# Altium PCB 210120_pcbVer2.PcbDoc
Units mm, origin at the board's own origin, x right, y up, seen from the top; angles counter-clockwise.
Board outline 122.05 x 85.98 mm, 2 copper layers (Top Layer, Bottom Layer); 54 components, 41 nets, 168 pads, 30 vias.
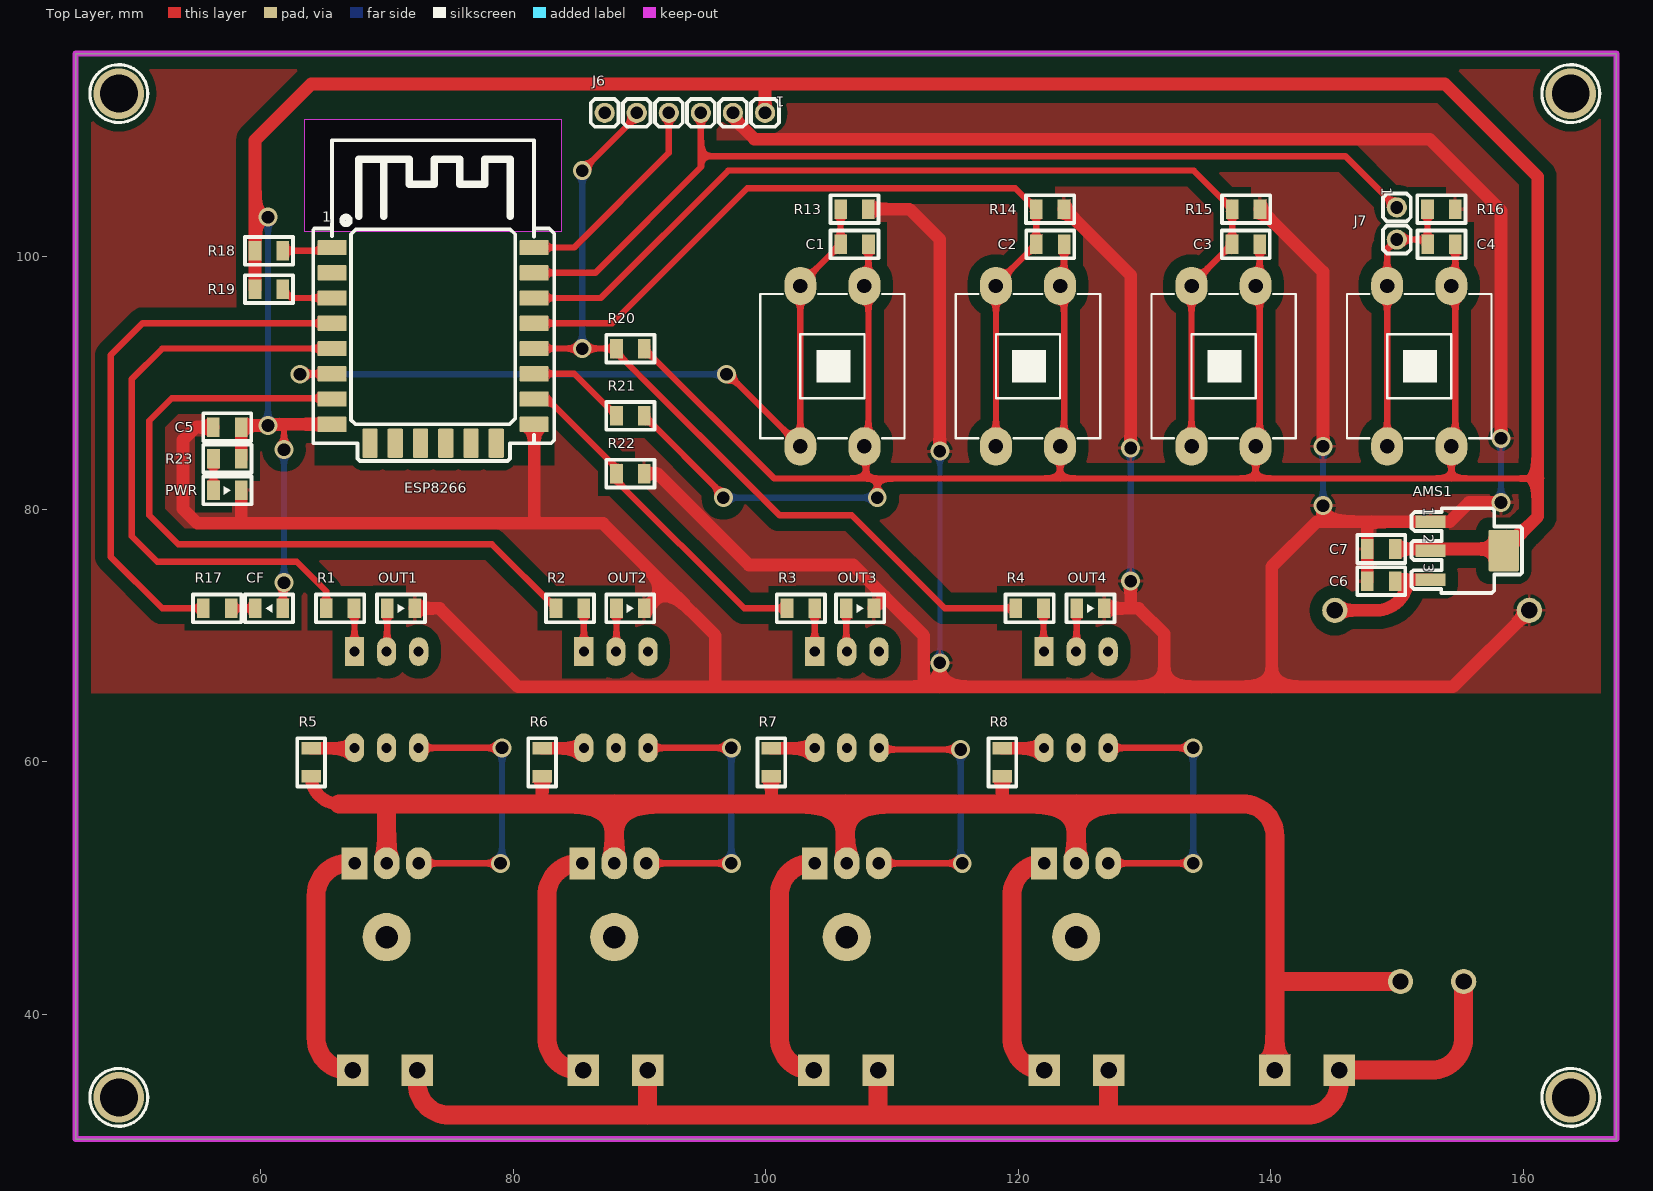
[diagram p0: Top Layer view]
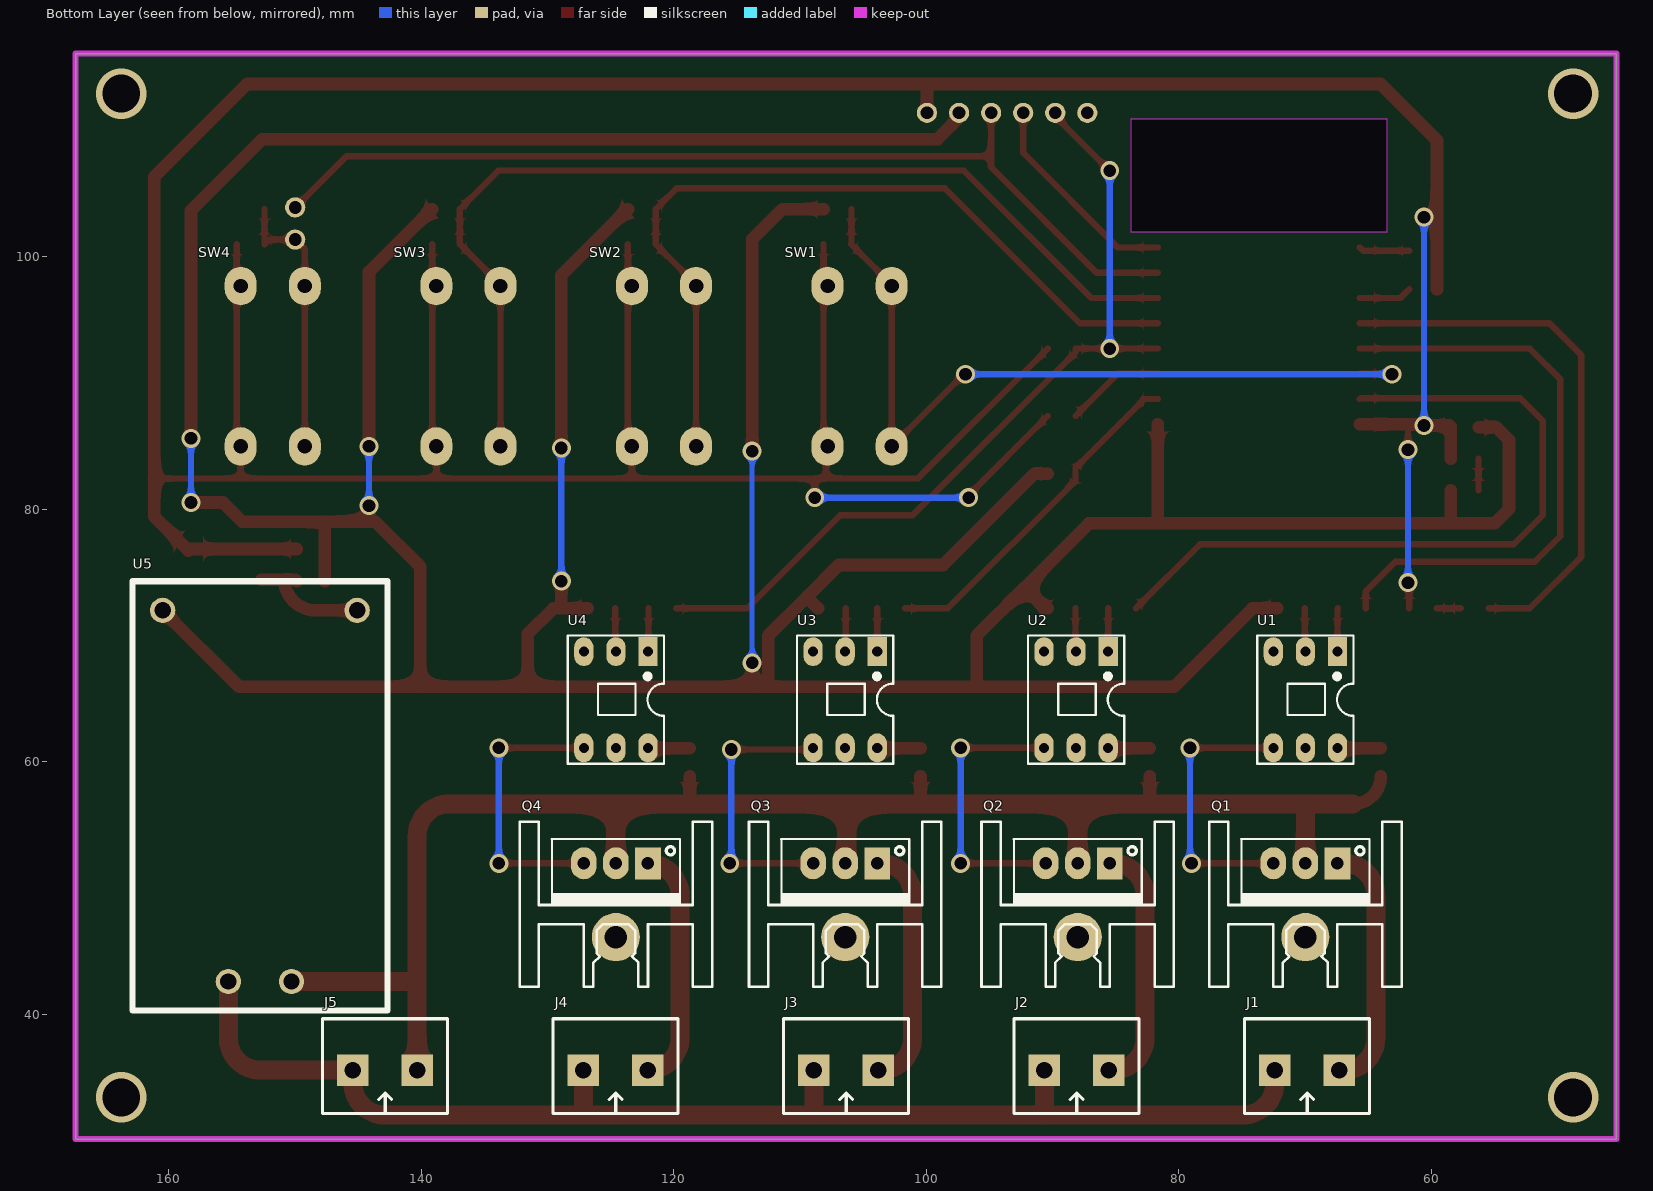
[diagram p1: Bottom Layer view, seen from below]

## Layer stack, top to bottom
Top Solder: solder mask 0.0102, Solder Resist, Dk 3.5
Top Layer: signal copper 0.0356
Dielectric 1: dielectric 0.32, FR-4, Dk 4.8
Bottom Layer: signal copper 0.0356
Bottom Solder: solder mask 0.0102, Solder Resist, Dk 3.5

## Board outline
45.339,30.099 45.339,116.078 167.386,116.078 167.386,30.099
cut-out: 63.5,101.981 63.5,110.871 83.82,110.871 83.82,101.981

## Design rules (kind name [scope] priority, off if disabled: settings)
Clearance [All] p1: gap=0.5 ignorepadtopadclearanceinfootprint=FALSE
ComponentClearance [All] p1: gap=0 collisioncheckmode=3 verticalgap=0 showdistances=FALSE
HoleSize [All] p1: absolutevalues=TRUE maxlimit=6 minlimit=0.025 maxpercent=80.000 minpercent=20.000
HoleToHoleClearance [All] p1: gap=0 allowstackedmicrovias=TRUE
MinimumSolderMaskSliver [All] p1: minsoldermaskwidth=0
PolygonConnect [All] p1: connectstyle=Relief reliefconductorwidth=0.254 reliefentries=4 polygonreliefangle="90 Angle" airgapwidth=0.254
RoutingVias [All] p1: holewidth=1 width=1.5 viastyle="Through Hole" minholewidth=1 minwidth=1.5 maxholewidth=1.5 maxwidth=2
SilkToSilkClearance [All] p1: silktosilkclearance=0
SilkToSolderMaskClearance [IsPad] p1: minsilkscreentomaskgap=0 clearancetoexposedcopper=TRUE
SolderMaskExpansion [All] p1: expansion=0
Width [All] p1: maxlimit=2 minlimit=0.4 preferedwidth=0.5
24 further rules are at their usual default settings.

## Classes and differential pairs
component class DATN_Schematic: "AC/DC 5V-3W" CF ESP8266 MOC3020 PWR R20 R21 R22 R23 SW1 SW2 SW3 SW4 U2 U3 U4

## Components (designator, comment, footprint, x,y, rotation, side; value= is the part's Value field where it differs from the comment)
AMS1 "AMS1117-3V3" AMS1117 144.804,78.308 r270 top
C1 "0.1uF/50V" "Cap 0805(2012)" 108.143,100.965 r180 top
C2 "0.1uF/50V" "Cap 0805(2012)" 123.637,100.965 r180 top
C3 "0.1uF/50V" "Cap 0805(2012)" 139.131,100.965 r180 top
C4 "0.1uF/50V" "Cap 0805(2012)" 154.625,100.965 r180 top
C5 "0.1uF/50V" "Cap 0805(2012)" 56.261,86.487 r0 top
C6 "22uF" "Cap 0805(2012)" 147.66,74.295 r0 top
C7 "22uF" "Cap 0805(2012)" 147.66,76.835 r0 top
CF "LED_BLUE" LED0805BLUE 60.663,72.136 r180 top value=Blue
ESP8266 "ESP8266-V12" "ESP-8266 V12" 65.661,100.711 r0 top
J1 "KF2" KF2-5.08 69.85,35.56 r0 bottom
J2 "KF2" KF2-5.08 88.106,35.56 r0 bottom
J3 "KF2" KF2-5.08 106.362,35.56 r0 bottom
J4 "KF2" KF2-5.08 124.619,35.56 r0 bottom
J5 "KF2" KF2-5.08 142.875,35.56 r0 bottom
J6 "Header 6" "HEADER x6" 93.599,111.379 r180 top
J7 "Header 2" "HEADER x2" 149.987,103.886 r270 top
OUT1 "LED_RED" LED0805RED 71.12,72.136 r0 top value=Red
OUT2 "LED_RED" LED0805RED 89.281,72.136 r0 top value=Red
OUT3 "LED_RED" LED0805RED 107.485,72.136 r0 top value=Red
OUT4 "LED_RED" LED0805RED 125.73,72.136 r0 top value=Red
PWR "LED_RED" LED0805RED 57.371,81.486 r0 top value=Red
Q1 "BTA24-600" TO220H1 69.977,51.943 r0 bottom
Q2 "BTA12-600" TO220H1 88.011,51.943 r0 bottom
Q3 "BTA12-600" TO220H1 106.426,51.943 r0 bottom
Q4 "BTA12-600" TO220H1 124.587,51.943 r0 bottom
R1 "39R" "Res 0805(2012)" 66.294,72.136 r180 top
R2 "39R" "Res 0805(2012)" 84.498,72.136 r180 top
R3 "39R" "Res 0805(2012)" 102.786,72.136 r180 top
R4 "39R" "Res 0805(2012)" 120.904,72.136 r180 top
R5 "1K" "Res 0805(2012)" 64.008,59.944 r90 top
R6 "1K" "Res 0805(2012)" 82.296,59.944 r90 top
R7 "1K" "Res 0805(2012)" 100.457,59.944 r90 top
R8 "1K" "Res 0805(2012)" 118.745,59.944 r90 top
R13 "10k" "Res 0805(2012)" 107.033,103.759 r180 top
R14 "10k" "Res 0805(2012)" 122.527,103.759 r180 top
R15 "10k" "Res 0805(2012)" 138.049,103.759 r180 top
R16 "10k" "Res 0805(2012)" 153.515,103.759 r180 top
R17 "330" "Res 0805(2012)" 56.563,72.136 r0 top
R18 "10k" "Res 0805(2012)" 60.653,100.457 r180 top
R19 "10k" "Res 0805(2012)" 60.653,97.409 r180 top
R20 "10k" "Res 0805(2012)" 89.281,92.71 r180 top
R21 "10k" "Res 0805(2012)" 89.281,87.376 r180 top
R22 "10k" "Res 0805(2012)" 89.281,82.804 r180 top
R23 "1k" "Res 0805(2012)" 57.371,83.987 r0 top
SW1 "SW" "SWITCH 12X12" 107.823,97.663 r90 bottom value="Button chip 4 pin"
SW2 "SW" "SWITCH 12X12" 123.317,97.663 r90 bottom value="Button chip 4 pin"
SW3 "SW" "SWITCH 12X12" 138.811,97.663 r90 bottom value="Button chip 4 pin"
SW4 "SW" "SWITCH 12X12" 154.305,97.663 r90 bottom value="Button chip 4 pin"
U1 "MOC3021M" DIP6 70.104,64.643 r0 bottom
U2 "MOC3021M" DIP6 88.265,64.643 r0 bottom
U3 "MOC3021M" DIP6 106.553,64.643 r0 bottom
U4 "MOC3021M" DIP6 124.714,64.643 r0 bottom
U5 "5V3W-HLK-PM01" "HLK_PM01 5V3W" 152.781,57.277 r90 bottom

## Footprints (in the part's own frame and the unit in brackets; to place one, negate y for a bottom-side part, rotate by r counter-clockwise, add the part's x,y. Pads: shape width x height; smd on the part's side, far side on the other; paste and mask are expansions set on the pad)
AMS1117 [mm] "SOT223, 4-Leads, Body 6.7x7.3mm (max), Pitch 2.30mm, IPC Medium Density"
  rrect10% 1x2.4 smd mask+0.05: 1(-0.7,7.85) 2(1.6,7.85) 3(3.9,7.85)
  rrect10% 3.3x2.4 smd mask+0.05: 4(1.6,13.65)
  silkscreen extent -1.75,6.35 4.95,15.1, body extent -1.6,7.3 4.9,14.3, height 1.85
"Cap 0805(2012)" [mm] "Capacitor 0805"
  rect 1x1.55 smd mask+0.1: 1(0,0) 2(2.2,0)
  silkscreen extent -0.8,-1.1 3,1.1, body extent 0.1,-0.65 2.1,0.66, height 0.73
DIP6 [mil]
  rect 60x90 hole 31.5: 1(-105,-160)
  oval 60x90 hole 31.5: 2(-5,-160) 3(95,-160) 4(95,140) 5(-5,140) 6(-105,140)
  silkscreen extent -155,-210 145,190, body extent -163,-167 155,147, height 170
"ESP-8266 V12" [mm]
  rrect10% 2.3x1.2 smd mask+0.05: 1(0,0) 2(0,-2) 3(0,-4) 4(0,-6) 5(0,-8) 6(0,-10) 7(0,-12) 8(0,-14) 15(16,-14) 16(16,-12) 17(16,-10) 18(16,-8) 19(16,-6) 20(16,-4) 21(16,-2) 22(16,0)
  rrect10% 1.2x2.3 smd mask+0.05: 9(3,-15.5) 10(5,-15.5) 11(7,-15.5) 12(9,-15.5) 13(11,-15.5) 14(13,-15.5)
  silkscreen extent -1.5,-16.9 17.6,8.5, body extent 0,-15.45 16,8.93, height 2.6
"HEADER x2" [mm] "Header 2"
  round 1.6 hole 1 mask+0.1: 1(0,0) 2(2.54,0)
  silkscreen extent -1.1,-1.1 3.64,1.1, body extent -1.3,-1.3 3.78,1.24, height 5.94
"HEADER x6" [mm] "Header 6"
  round 1.6 hole 1 mask+0.1: 1(-6.35,0) 2(-3.81,0) 3(-1.27,0) 4(1.27,0) 5(3.81,0) 6(6.35,0)
  silkscreen extent -7.45,-1.1 7.45,1.1, body extent -7.65,-1.3 7.59,1.24, height 5.94
"HLK_PM01 5V3W" [mm] "THOUGH, AC-DC"
  round 2 hole 1.3: 1(-14.7,2.5) 2(-14.7,-2.5) 3(14.7,7.7) 4(14.7,-7.7)
  silkscreen extent -17,-10.1 17,10.1, body extent -17.4,-10.3 16.6,9.9, height 15.6
KF2-5.08 [mm]
  rect 2.5x2.5 hole 1.3: 1(-2.54,0) 2(2.54,0)
  silkscreen extent -4.95,-4.08 4.95,3.43, body extent -5,-4.07 5,3.43, height 10
LED0805BLUE [mm] "598 series"
  rect 1x1.55 smd mask+0.1: 1(-1.1,0) 2(1.1,0)
  silkscreen extent -1.91,-1.1 1.9,1.1, body extent -0.96,-0.62 1.06,0.63, height 1.1
LED0805RED [mm] "598 series"
  rect 1x1.55 smd mask+0.1: 1(-1.1,0) 2(1.1,0)
  silkscreen extent -1.91,-1.1 1.9,1.1, body extent -1.04,-0.63 0.98,0.62, height 1.1
"Res 0805(2012)" [mm] "Resistor 0805"
  rect 1x1.55 smd mask+0.1: 1(-1.1,0) 2(1.1,0)
  silkscreen extent -1.91,-1.1 1.9,1.1, body extent -1.15,-0.69 1.15,0.66, height 0.76
"SWITCH 12X12" [mil]
  oval 120x100 hole 45: 1(0,0) 2(-500,-200) 3(-500,0) 4(0,-200)
  body extent -469,-329 3,143, height 169
TO220H1 [mil] "TO-220 - 1-2-3"
  round 150 hole 70: 0(0,230)
  rect 80x100 hole 39: 1(-100,0)
  oval 80x100 hole 39: 2(0,0) 3(100,0)
  silkscreen extent -300,-130 300,385, body extent -246,-82 250,329, height 1000

## Part data
AMS1: "Linear Voltage Regulator 3.3V 1A 15V Max SOT-223", ComponentLink1Description=Datasheet, ComponentLink1URL="D:\Dropbox\Datasheets\Power Management ICs\Linear Regulators\AMS1117.pdf", Unit Price=0.2000
C1 C2 C3 C4 C5 C6 C7: library part CAP_CER_0.1uF_50V_NPOL_1, "Ceramic Capacitor 1nF/50V (+-20% TH)/(+10%SMD)"
CF: "LED Blue", ComponentLink1Description=Datasheet, ComponentLink1URL="D:\Dropbox\Datasheets\Opto and Illumination\LEDs\SMD LED.pdf", Unit Price=0.0476
J1 J2 J3 J4 J5: Manufacturer="Würth Elektronik eiSos GmbH", partNo=691103110002, ComponentLink1 Description=Manufacturer, ComponentLink1URL=http://www.we-online.com, ComponentLink2 Description=Datasheet, ComponentLink2URL=http://katalog.we-online.de/em/datasheet/6911031100xx.pdf, Created by="Karrer Zheng", Created Date="29 October 2013", NoPins=2
OUT1 OUT2 OUT3 OUT4 PWR: "LED Red", ComponentLink1Description=Datasheet, ComponentLink1URL="D:\Dropbox\Datasheets\Opto and Illumination\LEDs\SMD LED.pdf", Unit Price=0.0476
Q1: library part BTA12-600, "Silicon Bidirectional Triode Thyristor", Code_JEDEC=TO-251-AA, ComponentLink1Description="Manufacturer Link", ComponentLink1URL=http://www.motorola.com/, DatasheetDocument=1999, LatestRevisionDate=17-Jul-2002, LatestRevisionNote="Re-released for DXP Platform.", Note="Pin 2 is electrically connected to Pin 4 (TAB)", PackageReference=369-03, Published=29-Sep-2000, Publisher="Altium Limited"
Q2 Q3 Q4: "Silicon Bidirectional Triode Thyristor", Code_JEDEC=TO-251-AA, ComponentLink1Description="Manufacturer Link", ComponentLink1URL=http://www.motorola.com/, DatasheetDocument=1999, LatestRevisionDate=17-Jul-2002, LatestRevisionNote="Re-released for DXP Platform.", Note="Pin 2 is electrically connected to Pin 4 (TAB)", PackageReference=369-03, Published=29-Sep-2000, Publisher="Altium Limited"
R1 R2 R3 R4 R5 R6 R7 R8 R13 R14 R15 R16 R17 R18 R19 R20 R21 R22 R23: library part "Resistor 0805", "Resistor 0805"
SW1 SW2 SW3 SW4: library part SW4, "Switch button 4 pin"

## Via types
v1: diameter 1.5, hole 1, Top Layer to Bottom Layer, 26 vias
v2: diameter 4, hole 3, Top Layer to Bottom Layer, 4 vias

## Nets (pads, with @x,y where several pads share a name; then routed paths per layer and width w, separated by ;. In a path a pad name is that pad's centre, name@x,y a point inside that pad or via, vN(x,y) a via of type N, cw(c..) or ccw(c..) an arc to the next point about the centre after c; other vN are vias at no path point)
3V3: AMS1.2 AMS1.4 C1.1 C2.1 C3.1 C4.1 C5.2 C7.2 CF.1 ESP8266.8 J6.1 R18.2 R19.2 R20.1 R21.1 R23.2 SW1.1 SW1.3 SW2.1 SW2.3 SW3.1 SW3.3 SW4.1 SW4.3 | length 374.5
  Top Layer w0.5: CF.1 61.763,74.082 v1(61.849,74.168) ; v1(61.849,84.709) 61.849,86.457 62.103,86.711 ; R21.1 96.647,81.11 v1(96.647,80.899) ; R20.1 100.668,82.423 107.95,82.423 ; C1.1 108.143,85.283 SW1.3 107.95,84.836 107.95,82.423 ; v1(108.839,80.899) 108.839,82.423 ; C2.1 123.637,85.283 SW2.3 123.317,82.423 ; C3.1 139.131,85.283 SW3.3 138.811,82.423 ; C4.1 154.625,85.283 SW4.3 154.305,82.423 ; 161.163,82.423 154.305,82.423 ; 107.95,82.423 108.839,82.423 ; 108.839,82.423 123.317,82.423 ; 123.317,82.423 138.811,82.423 ; 138.811,82.423 154.305,82.423
  Top Layer w1: R23.2 58.471,86.497 58.588,86.614 v1(60.579,86.614) 60.676,86.711 62.103,86.711 ESP8266.8 ; R19.2 R18.2 59.553,103.124 ; v1(60.579,103.124) 59.553,103.124 ; J6.1 99.949,113.538 100.076,113.665 ; C7.2 AMS1.4@158.369,76.835 ; AMS1.4 161.163,79.417 161.163,82.423 161.163,106.299 153.797,113.665 100.076,113.665 ; 59.553,103.124 59.553,109.21 64.008,113.665 100.076,113.665
  Bottom Layer w0.5: v1(60.579,86.614) v1(60.579,103.124) ; v1(61.849,74.168) v1(61.849,84.709) ; v1(96.647,80.899) v1(108.839,80.899)
5V: AMS1.3 C6.2 U5.4 | length 10
  Top Layer w1: U5.4 148.336,71.977 ccw(c148.336,74.517) 150.874,74.408 ; C6.2 149.973,74.408 150.874,74.408 ; AMS1.3 150.874,74.408
GND: AMS1.1 C5.1 C6.1 C7.1 ESP8266.15 J6.2 OUT1.2 OUT2.2 OUT3.2 OUT4.2 PWR.2 R13.1 R14.1 R15.1 R16.1 R22.1 U5.3 | length 431.6
  Top Layer w1: C5.1 54.864,86.487 53.848,85.471 53.848,80.01 54.991,78.867 58.42,78.867 ; PWR.2 58.471,78.918 58.42,78.867 ; OUT1.2 74.168,72.136 80.391,65.913 96.139,65.913 ; ESP8266.15 81.661,79.248 82.042,78.867 ; OUT2.2 90.551,72.136 92.202,73.787 ; R22.1 91.44,82.804 98.679,75.565 106.934,75.565 109.41,73.088 ; J6.2 97.409,110.998 99.107,109.3 152.574,109.3 158.242,103.632 v1(158.242,85.598) ; R13.1 111.379,103.759 113.792,101.346 v1(113.792,84.582) ; OUT3.2 109.41,72.962 109.41,73.088 ; 112.522,66.421 112.522,69.977 109.41,73.088 ; v1(113.792,67.818) 113.792,65.913 ; R14.1 123.674,103.759 128.905,98.528 v1(128.905,84.836) ; OUT4.2 128.778,72.136 ; v1(128.905,74.295) 128.905,72.263 128.778,72.136 ; R15.1 139.168,103.759 144.145,98.782 v1(144.145,84.963) ; v1(144.145,80.264) 144.145,79.008 ; C6.1 147.66,78.713 147.955,79.008 ; v1(158.242,80.518) 155.702,80.518 154.192,79.008 AMS1.1 147.955,79.008 ; U5.3 154.417,65.913 140.081,65.913 ; 58.42,78.867 82.042,78.867 ; 82.042,78.867 87.122,78.867 92.202,73.787 ; 92.202,73.787 96.012,69.977 96.012,66.04 96.139,65.913 ; 96.139,65.913 113.792,65.913 ; 113.792,65.913 131.572,65.913 ; 128.778,72.136 129.54,72.136 131.572,70.104 131.572,65.913 ; 131.572,65.913 140.081,65.913 ; 140.081,65.913 140.081,75.438 143.651,79.008 144.145,79.008 ; 144.145,79.008 147.955,79.008
  Bottom Layer w0.4: v1(113.792,67.818) v1(113.792,84.582)
  Bottom Layer w0.5: v1(128.905,74.295) v1(128.905,84.836) ; v1@144.145,80.518 v1(144.145,84.963) ; v1@158.242,80.772 v1(158.242,85.598)
GPIO0: ESP8266.18 J6.5 R4.2 R20.2 | length 67.3
  Top Layer w0.5: ESP8266.18 R20.2 R20.2 88.181,92.413 101.092,79.502 106.807,79.502 114.173,72.136 R4.2 ; v1(85.471,106.807) 89.789,111.125 J6.5
  Bottom Layer w0.5: v1(85.471,92.71) v1(85.471,106.807)
GPIO3: C4.2 J7.2 R16.2 SW4.2 SW4.4 | length 22.1
  Top Layer w0.5: SW4.2 SW4.4 149.225,100.584 J7.2 152.044,101.346 C4.2@152.415,100.975 ; R16.2 C4.2@152.415,100.975 ; C4.2 C4.2@152.415,100.975
GPIO4: C2.2 ESP8266.19 R14.2 SW2.2 SW2.4 | length 65
  Top Layer w0.5: ESP8266.19 87.853,94.711 98.552,105.41 119.776,105.41 R14.2 121.427,100.975 C2.2 118.237,97.765 SW2.4 SW2.2
GPIO5: C3.2 ESP8266.20 R15.2 SW3.2 SW3.4 | length 80.9
  Top Layer w0.5: ESP8266.20 86.932,96.711 97.028,106.807 133.901,106.807 R15.2 136.949,100.983 C3.2 133.731,97.765 SW3.4 SW3.2
GPIO12: C1.2 ESP8266.6 R13.2 SW1.2 SW1.4 | length 64.7
  Top Layer w0.5: v1(63.119,90.678) 63.152,90.711 ESP8266.6 ; v1(96.901,90.678) 97.028,90.678 SW1.2 SW1.4 102.743,97.765 C1.2 105.933,100.975 R13.2
  Bottom Layer w0.5: v1(63.119,90.678) v1(96.901,90.678)
GPIO13: ESP8266.7 R2.2 | length 58
  Top Layer w0.5: ESP8266.7 65.599,88.773 52.959,88.773 51.181,86.995 51.181,79.502 53.467,77.216 78.318,77.216 R2.2
GPIO14: ESP8266.5 R1.2 | length 47.9
  Top Layer w0.5: R1.2 65.194,73.49 62.865,75.819 51.816,75.819 49.784,77.851 49.784,90.297 52.197,92.71 65.66,92.71 ESP8266.5
GPIO15: ESP8266.16 R3.2 R22.2 | length 27.5
  Top Layer w0.5: ESP8266.16 82.739,88.711 88.181,83.269 R22.2 88.181,82.253 98.298,72.136 R3.2
GPIO16: ESP8266.4 R17.1 | length 43.6
  Top Layer w0.5: R17.1 52.197,72.136 48.133,76.2 48.133,92.202 50.642,94.711 ESP8266.4
L_IN: J5.1 Q1.2 Q2.2 Q3.2 Q4.2 R5.1 R6.1 R7.1 R8.1 U5.2 | length 133.3
  Top Layer w1: R5.1 ccw(c66.21,58.844) 66.21,56.642 ; 82.169,56.642 82.296,56.769 R6.1 ; R7.1 100.457,57.023 100.838,56.642 ; 118.618,56.642 118.745,56.769 R8.1
  Top Layer w1.5: 66.21,56.642 70.104,56.642 ; Q1.2 69.977,56.515 cw(c70.104,56.515) 70.104,56.642 ; Q2.2 88.011,56.642 ; Q3.2 106.299,52.07 106.299,56.642 ; Q4.2 124.587,56.642 ; J5.1 140.335,42.545 ; U5.2 140.367,42.577 140.335,42.545 ; 70.104,56.642 82.169,56.642 88.011,56.642 ; 88.011,56.642 100.838,56.642 106.299,56.642 ; 106.299,56.642 118.618,56.642 124.587,56.642 ; 124.587,56.642 137.795,56.642 cw(c137.795,54.102) 140.335,54.102 140.335,42.545
L_OUT1: J1.1 Q1.1 | length 20.2
  Top Layer w1.5: J1.1 66.929,35.56 cw(c66.929,38.1) 64.389,38.1 64.389,49.403 cw(c66.929,49.403) 66.929,51.943 Q1.1
L_OUT2: J2.1 Q2.1 | length 19.9
  Top Layer w1.5: Q2.1 85.217,51.943 ccw(c85.217,49.403) 82.677,49.403 82.677,38.1 ccw(c85.217,38.1) 85.217,35.56 J2.1
L_OUT3: J3.1 Q3.1 | length 19.7
  Top Layer w1.5: J3.1 103.632,35.56 cw(c103.632,38.1) 101.092,38.1 101.092,49.403 cw(c103.632,49.403) 103.632,51.943 Q3.1
L_OUT4: J4.1 Q4.1 | length 19.3
  Top Layer w1.5: Q4.1 ccw(c122.047,49.403) 119.507,49.403 119.507,38.1 ccw(c122.047,38.1) 122.047,35.56 J4.1
N_IN: J1.2 J2.2 J3.2 J4.2 J5.2 U5.1 | length 104.5
  Top Layer w1.5: J1.2 72.39,34.544 ccw(c74.93,34.544) 74.93,32.004 90.678,32.004 ; J2.2 90.646,32.036 90.678,32.004 ; J3.2 108.902,32.067 108.839,32.004 ; J4.2 127.159,32.099 127.254,32.004 ; U5.1 155.281,38.1 cw(c152.741,38.1) 152.741,35.56 J5.2 145.415,34.544 cw(c142.875,34.544) 142.875,32.004 127.254,32.004 ; 90.678,32.004 108.839,32.004 ; 108.839,32.004 127.254,32.004
NetCF_2: CF.2 R17.2 | length 1.9
  Top Layer w0.5: R17.2 CF.2
NetESP8266_1: ESP8266.1 R18.1 | length 4
  Top Layer w0.5: R18.1 65.407,100.457 ESP8266.1
NetESP8266_3: ESP8266.3 R19.1 | length 4.2
  Top Layer w0.5: R19.1 62.451,96.711 ESP8266.3
NetESP8266_17: ESP8266.17 R21.2 | length 7.9
  Top Layer w0.5: ESP8266.17 84.846,90.711 R21.2
NetOUT1_1: OUT1.1 U1.2 | length 3.4
  Top Layer w0.5: U1.2 70.02,68.75 OUT1.1
NetOUT2_1: OUT2.1 U2.2 | length 3.4
  Top Layer w0.5: U2.2 88.181,68.75 OUT2.1
NetOUT3_1: OUT3.1 U3.2 | length 3.4
  Top Layer w0.5: OUT3.1 106.385,68.748 U3.2
NetOUT4_1: OUT4.1 U4.2 | length 3.4
  Top Layer w0.5: U4.2 124.63,68.75 OUT4.1
NetPWR_1: PWR.1 R23.1 | length 2.5
  Top Layer w0.5: PWR.1 R23.1
NetQ1_3: Q1.3 U1.4 | length 22.3
  Top Layer w0.5: Q1.3 v1(78.994,51.943) ; U1.4 v1(79.121,61.087)
  Bottom Layer w0.5: v1(78.994,51.943) 79.121,52.07 v1(79.121,61.087)
NetQ2_3: Q2.3 U2.4 | length 22.5
  Top Layer w0.5: Q2.3 v1(97.282,51.943) ; U2.4 v1(97.282,61.087)
  Bottom Layer w0.5: v1(97.282,51.943) v1(97.282,61.087)
NetQ3_3: Q3.3 U3.4 | length 22.2
  Top Layer w0.5: Q3.3 v1(115.57,51.943) ; U3.4 109.093,60.96 v1(115.443,60.96)
  Bottom Layer w0.5: v1(115.443,60.96) 115.443,52.07 v1(115.57,51.943)
NetQ4_3: Q4.3 U4.4 | length 22.6
  Top Layer w0.5: Q4.3 v1(133.858,51.943) ; U4.4 v1(133.858,61.087)
  Bottom Layer w0.5: v1(133.858,51.943) v1(133.858,61.087)
NetR1_1: R1.1 U1.1 | length 3.4
  Top Layer w0.5: R1.1 67.437,72.093 U1.1
NetR2_1: R2.1 U2.1 | length 3.4
  Top Layer w0.5: U2.1 R2.1
NetR3_1: R3.1 U3.1 | length 3.4
  Top Layer w0.5: U3.1 R3.1
NetR4_1: R4.1 U4.1 | length 3.4
  Top Layer w0.5: R4.1 122.004,68.75 U4.1
NetR5_2: R5.2 U1.6 | length 3.4
  Top Layer w1: R5.2 67.394,61.044 U1.6
NetR6_2: R6.2 U2.6 | length 3.3
  Top Layer w1: R6.2 85.555,61.044 U2.6
NetR7_2: R7.2 U3.6 | length 3.4
  Top Layer w1: R7.2 103.843,61.044 U3.6
NetR8_2: R8.2 U4.6 | length 3.3
  Top Layer w1: R8.2 122.004,61.044 U4.6
RXD: ESP8266.21 J6.3 J7.1 | length 77.8
  Top Layer w0.5: ESP8266.21 86.519,98.711 94.869,107.061 94.869,107.95 ; J6.3 94.869,107.95 ; J7.1 145.923,107.95 94.869,107.95
TXD: ESP8266.22 J6.4 | length 16.9
  Top Layer w0.5: ESP8266.22 84.836,100.711 92.329,108.204 J6.4
pads on no net: ESP8266.2 ESP8266.9 ESP8266.10 ESP8266.11 ESP8266.12 ESP8266.13 ESP8266.14 J6.6 Q1.0 Q2.0 Q3.0 Q4.0 U1.3 U1.5 U2.3 U2.5 U3.3 U3.5 U4.3 U4.5
copper on no net:
  other v2: 48.768,33.403 163.768,33.403 48.768,112.903 163.768,112.903

## Polygon pours and split planes (outlines as drawn)
GND on Top Layer "GND_L01_P000" (solid, remove dead copper, pour order 0): 45.72,115.57 45.72,65.405 167.005,65.405 167.005,115.57

## Keep-outs
Keep-Out Layer:
  the board outline again, w0.5

## Other copper
Top Layer:
  pour cut-out: 64.262,112.649 64.262,83.439 83.312,83.439 83.312,112.649

## Silkscreen, mask and mechanical layers (free items; w line width, h text height)
Top Overlay:
  circle w0.254: c163.768,112.903 r2.293
  circle w0.254: c48.768,112.903 r2.293
  circle w0.254: c48.768,33.403 r2.293
  circle w0.254: c163.768,33.403 r2.293

## Text inside footprints (layer, text, board x,y; h text height)
AMS1: Top Overlay "1" at 152.104,80.158 h0.8 r270; Top Overlay "3" at 152.104,75.708 h0.8 r270; Top Overlay "2" at 152.104,78.008 h0.8 r270; Mechanical 1 "3" at 154.204,74.658 h0.8 r270; Mechanical 1 "2" at 154.204,77.008 h0.8 r270; Mechanical 1 "1" at 154.204,79.108 h0.8 r270
ESP8266: Top Overlay "1" at 64.861,102.761 h0.8
J6: Top Overlay "1" at 101.529,112.649 h0.8 r180; Mechanical 1 "4" at 92.629,111.749 h0.8 r180; Mechanical 1 "3" at 95.129,111.749 h0.8 r180; Mechanical 1 "2" at 97.709,111.749 h0.8 r180; Mechanical 1 "1" at 100.109,111.749 h0.8 r180; Mechanical 1 "5" at 90.029,111.749 h0.8 r180; Mechanical 1 "6" at 87.559,111.799 h0.8 r180
J7: Top Overlay "1" at 148.787,105.486 h0.8 r270; Mechanical 1 "1" at 149.587,103.986 h0.8 r270; Mechanical 1 "2" at 149.587,101.586 h0.8 r270